# EAGLE board mrShark 08 (EAGLE 6.1)
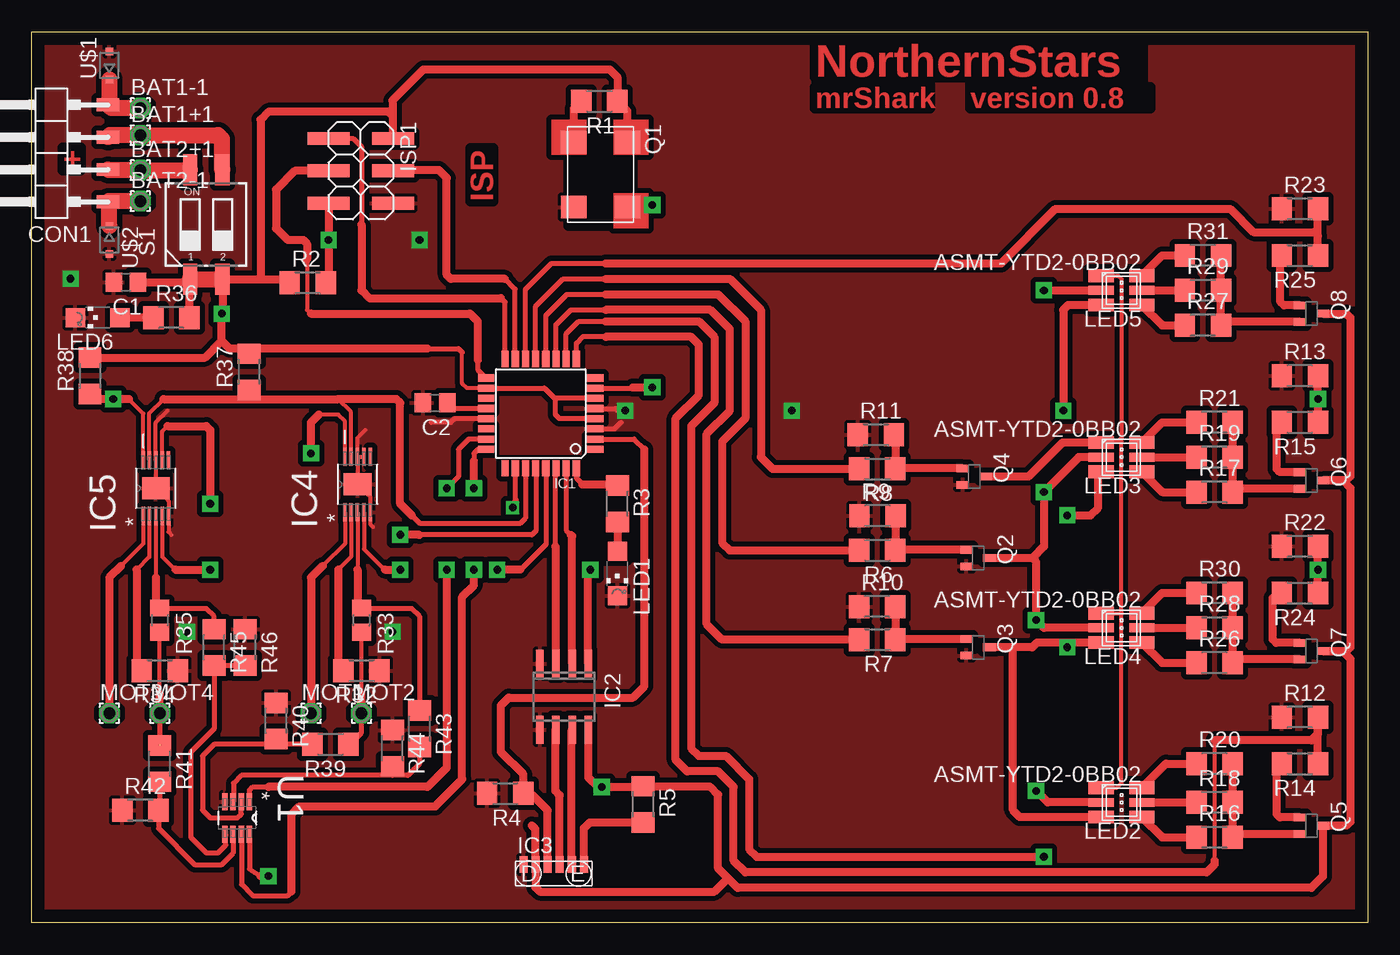
[diagram p0: board, top side]
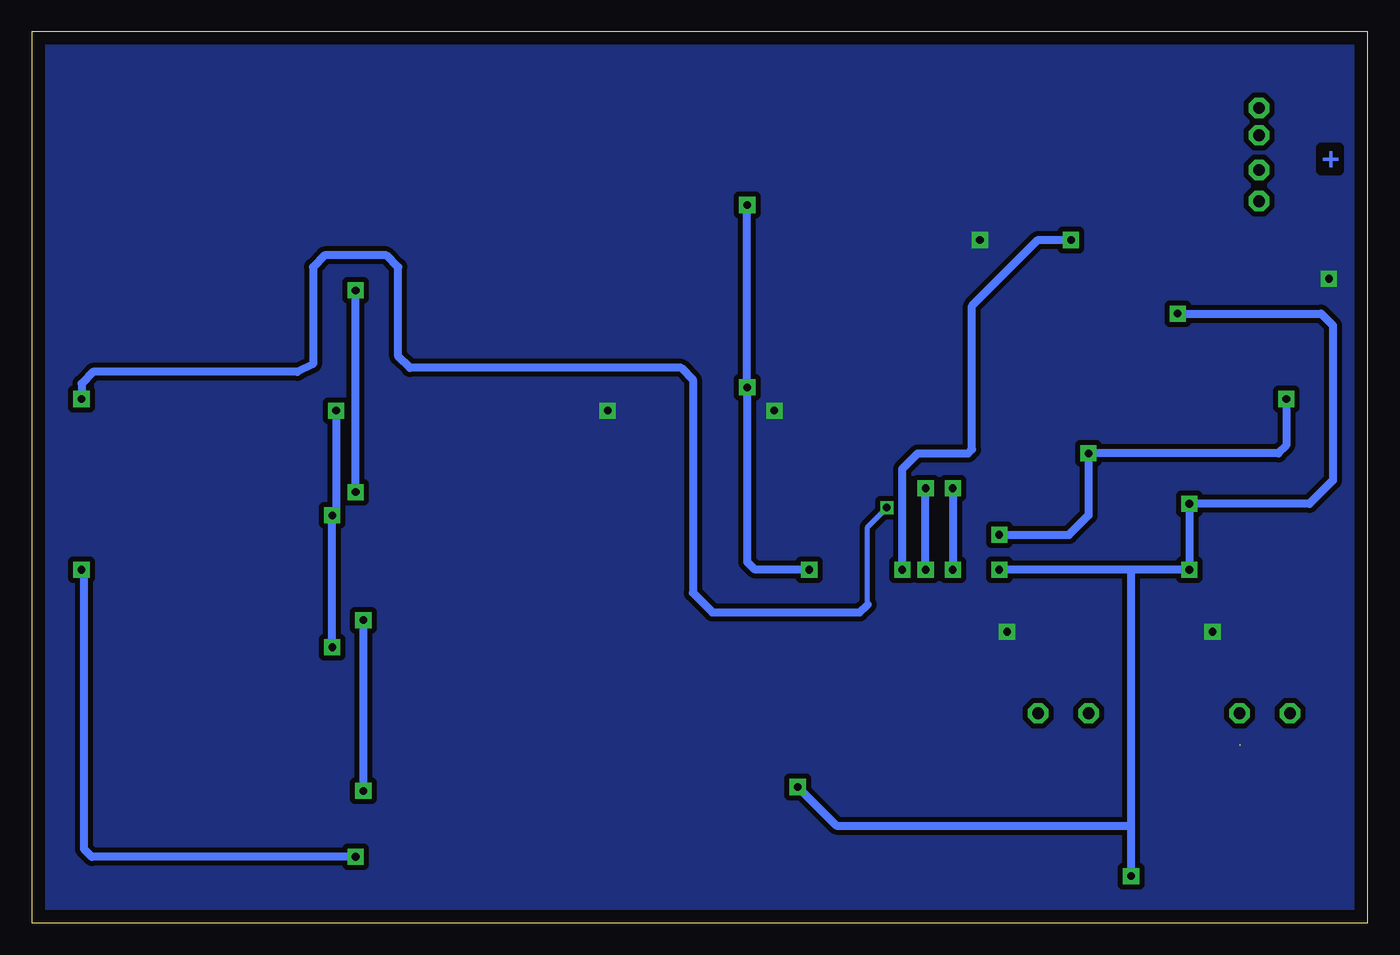
[diagram p1: board, bottom side, seen from below]

Size 105 x 70 mm. Coordinates in mm from the lower left corner, seen from the top.
Outline: 0,0 0,70 105,70 105,0 0,0
Copper layers (1*16): Top 0.035mm / dielectric 1.5mm / Bottom 0.035mm
Design rules: minimum track width 10mil, minimum drill 24mil, track to track 8mil, track to pad 8mil, pad to pad 8mil, via to via 8mil, smd to smd 8mil, copper to edge 40mil, drill to drill 8mil, minimum pad ring 10mil, minimum via ring 8mil, stop-mask expansion 4mil, vias tented up to drill 0mil, thermal gap 10mil

## Footprints (pad centres in the part's own frame; a part is rotated, then mirrored left to right if it is on the bottom)
1,6/0,9 = drill 0.914 pad 1.6 octagon: 1 0,0
C0805 = smd 1.3 x 1.5: 1 -0.95,0; 2 0.95,0
1X04SMD/90 = smd 1.016 x 1.778: 1 -1.27,-5.08; 2 1.27,-5.08; 3 3.81,-5.08; 4 6.35,-5.08
TQFP32-08 = smd 1.27 x 0.559: 1 -4.293,2.8; 2 -4.293,2; 3 -4.293,1.2; 4 -4.293,0.4; 5 -4.293,-0.4; 6 -4.293,-1.2; 7 -4.293,-2; 8 -4.293,-2.8; 17 4.293,-2.8; 18 4.293,-2; 19 4.293,-1.2; 20 4.293,-0.4; 21 4.293,0.4; 22 4.293,1.2; 23 4.293,2; 24 4.293,2.8 | smd 0.559 x 1.27: 9 -2.8,-4.293; 10 -2,-4.293; 11 -1.2,-4.293; 12 -0.4,-4.293; 13 0.4,-4.293; 14 1.2,-4.293; 15 2,-4.293; 16 2.8,-4.293; 25 2.8,4.293; 26 2,4.293; 27 1.2,4.293; 28 0.4,4.293; 29 -0.4,4.293; 30 -1.2,4.293; 31 -2,4.293; 32 -2.8,4.293
SO-08 = smd 0.6 x 2.2: 1 -1.905,-2.6; 2 -0.635,-2.6; 3 0.635,-2.6; 4 1.905,-2.6; 5 1.905,2.6; 6 0.635,2.6; 7 -0.635,2.6; 8 -1.905,2.6
TFBS4711 = smd 0.635 x 1.27: 1 2.37,0.72; 2 1.42,0.72; 3 0.47,0.72; 4 -0.48,0.72; 5 -1.43,0.72; 6 -2.38,0.72
SOP65P640X110-15N = smd 1.422 x 0.279: 1 -2.184,0.991; 2 -2.184,0.508; 3 -2.184,0; 4 -2.184,-0.508; 5 -2.184,-0.991; 6 2.184,-0.991; 7 2.184,-0.508; 8 2.184,0; 9 2.184,0.508; 10 2.184,0.991 | smd 1.727 x 2.184: 11 0,0
2X03SMD = smd 1.016 x 3.302: 1 -1.27,-3.81; 2 -1.27,1.27; 3 1.27,-3.81; 4 1.27,1.27; 5 3.81,-3.81; 6 3.81,1.27
CHIPLED_1206 = smd 1.5 x 1.5: A 0,-1.75; C 0,1.75
PLCC6K = smd 2 x 1: 1 1.6,-1.15; 3 1.6,1.15; 4 -1.6,1.15; 6 -1.6,-1.15 | smd 2 x 0.7: 2 1.6,0; 5 -1.6,0
HC736 = smd 1.8 x 2: 1 -2.54,-2.1; 2 2.54,-2.1; 3 2.54,2.1; 4 -2.54,2.1
SOT323-BEC = smd 0.6 x 1: B -0.65,-0.9; C 0,0.9; E 0.65,-0.9
R1206 = smd 1.6 x 1.803: 1 -1.422,0; 2 1.422,0
R0805 = smd 1.3 x 1.5: 1 -0.95,0; 2 0.95,0
CTS-219-02 = smd 1.13 x 2.44: 1 -1.27,-4.3; 2 1.27,-4.3; 3 1.27,4.3; 4 -1.27,4.3
SOT65P280X145-8N = smd 1.321 x 0.432: 1 -1.27,0.965; 2 -1.27,0.33; 3 -1.27,-0.33; 4 -1.27,-0.965; 5 1.27,-0.965; 6 1.27,-0.33; 7 1.27,0.33; 8 1.27,0.965
SOD323-R = smd 0.6 x 0.6: A 1.1,0; C -1.1,0

## Placement (x,y rotation side)
BAT1+1  [1,6/0,9]  8.53,61.87 0 top
BAT1-1  [1,6/0,9]  8.53,64.01 0 top
BAT2+1  [1,6/0,9]  8.53,59.13 0 top
BAT2-1  [1,6/0,9]  8.53,56.69 0 top
C1  100n  [C0805]  7.39,50.32 180 top
C2  100n  [C0805]  31.7,40.84 180 top
CON1  [1X04SMD/90]  0.91,57.91 90 top
IC1  MEGA48/88/168-AU  [TQFP32-08]  40,40 180 top
IC2  TIR1000PSR  [SO-08]  41.83,17.75 180 top
IC3  TFBS4711TR1  [TFBS4711]  41.02,3.86 0 top
IC4  DRV8830DGQRMSOP  [SOP65P640X110-15N]  25.6,34.44 90 top
IC5  DRV8830DGQRMSOP  [SOP65P640X110-15N]  9.75,34.14 90 top
ISP1  [2X03SMD]  27.13,60.35 270 top
LED1  green  [CHIPLED_1206]  46.02,27.43 180 top
LED2  ASMT-YTD2-0BB02  [PLCC6K]  85.65,9.45 180 top
LED3  ASMT-YTD2-0BB02  [PLCC6K]  85.65,36.58 180 top
LED4  ASMT-YTD2-0BB02  [PLCC6K]  85.65,23.16 180 top
LED5  ASMT-YTD2-0BB02  [PLCC6K]  85.65,49.68 180 top
LED6  red  [CHIPLED_1206]  5.18,47.55 90 top
MOT1  [1,6/0,9]  21.95,16.46 0 top
MOT2  [1,6/0,9]  25.91,16.46 0 top
MOT3  [1,6/0,9]  6.1,16.46 0 top
MOT4  [1,6/0,9]  10.06,16.46 0 top
Q1  ASFLM1-1.8432MHZ-L-C-T  [HC736]  44.7,58.78 270 top
Q2  BC817W  [SOT323-BEC]  74.37,28.65 270 top
Q3  BC817W  [SOT323-BEC]  74.37,21.64 270 top
Q4  BC817W  [SOT323-BEC]  74.07,35.05 270 top
Q5  BC817W  [SOT323-BEC]  100.58,7.62 270 top
Q6  BC817W  [SOT323-BEC]  100.58,34.75 270 top
Q7  BC817W  [SOT323-BEC]  100.58,21.34 270 top
Q8  BC817W  [SOT323-BEC]  100.58,47.85 270 top
R1  100k  [R1206]  44.6,64.54 180 top
R2  100k  [R1206]  21.69,50.27 0 top
R3  130R  [R1206]  46.02,32.92 270 top
R4  100k  [R1206]  37.21,10.16 180 top
R5  27R  [R1206]  48.06,9.3 270 top
R6  2k  [R1206]  66.45,29.26 180 top
R7  1k  [R1206]  66.45,22.25 180 top
R8  2k  [R1206]  66.45,35.66 180 top
R9  100k  [R1206]  66.47,31.98 0 top
R10  100k  [R1206]  66.45,24.84 0 top
R11  100k  [R1206]  66.34,38.33 0 top
R12  100k  [R1206]  99.67,16.15 0 top
R13  100k  [R1206]  99.67,42.98 0 top
R14  560R  [R1206]  99.67,12.5 180 top
R15  560R  [R1206]  99.67,39.32 180 top
R16  75R  [R1206]  92.96,6.71 0 top
R17  75R  [R1206]  92.96,33.83 0 top
R18  130R  [R1206]  92.96,9.45 0 top
R19  130R  [R1206]  92.96,36.58 0 top
R20  130R  [R1206]  92.96,12.5 0 top
R21  130R  [R1206]  92.96,39.32 0 top
R22  100k  [R1206]  99.67,29.57 0 top
R23  100k  [R1206]  99.67,56.08 0 top
R24  560R  [R1206]  99.67,25.91 180 top
R25  560R  [R1206]  99.67,52.43 180 top
R26  75R  [R1206]  92.96,20.42 0 top
R27  75R  [R1206]  92.05,46.94 0 top
R28  130R  [R1206]  92.96,23.16 0 top
R29  130R  [R1206]  92.05,49.68 0 top
R30  130R  [R1206]  92.96,25.91 0 top
R31  130R  [R1206]  92.05,52.43 0 top
R32  0.95R  [R1206]  25.91,19.81 180 top
R33  0R2  [R0805]  25.91,23.77 270 top
R34  0.95R  [R1206]  10.06,19.81 180 top
R35  0R2  [R0805]  10.06,23.77 270 top
R36  130R  [R1206]  10.97,47.55 0 top
R37  1k8  [R1206]  17.07,43.28 90 top
R38  1k8  [R1206]  4.57,42.98 90 top
R39  1k5  [R1206]  23.47,14.02 180 top
R40  75k  [R1206]  19.2,15.85 270 top
R41  1k5  [R1206]  10.06,12.5 270 top
R42  75k  [R1206]  8.53,8.84 0 top
R43  1k5  [R1206]  30.48,15.24 270 top
R44  75k  [R1206]  28.35,13.72 270 top
R45  1k5  [R1206]  14.33,21.64 270 top
R46  75k  [R1206]  16.76,21.64 270 top
S1  MCEMR-02-T  [CTS-219-02]  13.72,54.86 0 top
U1  OPA2348AIDCNTG4  [SOT65P280X145-8N]  16.15,8.23 270 top
U$1  PMEG2010EAR  [SOD323-R]  6.1,67.36 90 top
U$2  PMEG2010EAR  [SOD323-R]  6.1,53.64 270 top

## Library data of the parts
BAT1+1 BAT1-1 BAT2+1 BAT2-1 MOT1-MOT4 = wirepad
C1 C2 R1-R46 = rcl
CON1 ISP1 = pinhead-2
IC1 = avr-6
IC2 = texas
IC3 = vishay
IC4 IC5 = texas; MPN: DRV8830DGQR; OC_FARNELL: 1863106; OC_NEWARK: 58T1482; PACKAGE: MSOP-10; SUPPLIER: TEXAS INSTRUMENTS
LED1-LED6 = led
Q1 = crystal
Q2-Q8 = transistor-npn
S1 = switch-dil
U1 = texas; MPN: OPA2348AIDCNTG4; OC_FARNELL: 1207098; OC_NEWARK: 97K6805; PACKAGE: SOT23-8; SUPPLIER: Texas Instruments
U$1 U$2 = diode

## Nets
BAT1+: BAT1+1.1 CON1.3 S1.3
BAT1-: BAT1-1.1 CON1.4 U$1.C
BAT2+: BAT2+1.1 CON1.2 S1.4
BAT2-: BAT2-1.1 CON1.1 U$2.C
CLK: IC1.7 IC2.1 Q1.3
COLOR_B: LED2.1 LED3.1 LED4.1 LED5.1 Q4.C
COLOR_G: LED2.2 LED3.2 LED4.2 LED5.2 Q2.C
COLOR_R: LED2.3 LED3.3 LED4.3 LED5.3 Q3.C
GND: C1.2 C2.2 IC1.3 IC1.5 IC1.21 IC2.4 IC2.5 IC3.6 IC4.5 IC4.7 IC4.8 IC4.11 IC5.5 IC5.8 IC5.11 ISP1.6 LED1.C LED6.C Q1.2 Q2.E Q3.E Q4.E R4.2 R9.1 R10.1 R11.1 R12.1 R13.1 R22.1 R23.1 R32.1 R34.1 R40.1 R42.1 R44.1 R46.1 U1.4 U$1.A U$2.A
INT1: IC1.1
IR_SD: IC1.2 IC3.4 R4.1
IRDA: IC3.1 R5.2
ISENS_MOTL: IC1.23 U1.1
ISENS_MOTR: IC1.24 U1.7
LED1: IC1.9 R12.2 R14.1
LED2: IC1.10 R22.2 R24.1
LED3: IC1.26 R13.2 R15.1
LED4: IC1.14 R23.2 R25.1
LED_B: IC1.13 R8.2
LED_G: IC1.12 R6.2
LED_R: IC1.11 R7.2
MISO: IC1.16 ISP1.1
MOSI: IC1.15 ISP1.4
N$1: IC4.1 MOT1.1
N$2: IC4.2 R32.2
N$3: R39.2 R40.2 U1.2
N$4: Q1.1 R1.2
N$5: LED2.4 R16.1
N$6: IC5.1 MOT3.1
N$7: IC5.2 R34.2
N$8: LED2.5 R18.1
N$9: Q5.E R16.2 R18.2 R20.2
N$10: LED4.4 R26.1
N$11: LED4.5 R28.1
N$12: LED4.6 R30.1
N$13: Q7.E R26.2 R28.2 R30.2
N$14: Q6.E R17.2 R19.2 R21.2
N$15: LED3.4 R17.1
N$16: LED3.5 R19.1
N$17: LED3.6 R21.1
N$18: Q8.E R27.2 R29.2 R31.2
N$19: Q6.B R15.2
N$20: LED5.4 R27.1
N$21: LED5.5 R29.1
N$22: LED5.6 R31.1
N$23: Q8.B R25.2
N$24: Q7.B R24.2
N$25: Q5.B R14.2
N$26: C2.1 IC1.20
N$27: LED2.6 R20.1
N$28: LED6.A R36.1
N$29: IC1.32 R3.1
N$30: LED1.A R3.2
N$31: R41.2 R42.2 U1.6
N$32: R43.2 R44.2 U1.3
N$33: R45.2 R46.2 U1.5
RESET: IC1.29 ISP1.5 R2.2
RXD: IC1.30 IC2.3
RXIR: IC2.6 IC3.3
SCK: IC1.17 ISP1.3
SCL: IC1.28 IC4.10 IC5.10 R38.1
SDA: IC1.27 IC4.9 IC5.9 R37.1
SENS_MOTL1: IC4.3 R33.1 R43.1
SENS_MOTL2: MOT2.1 R33.2 R39.1
SENS_MOTR1: IC5.3 R35.1 R45.1
SENS_MOTR2: MOT4.1 R35.2 R41.1
TXD: IC1.31 IC2.2
TXIR: IC2.7 IC3.2
VCC: C1.1 IC1.4 IC1.6 IC1.18 IC2.8 IC3.5 IC4.4 IC5.4 IC5.7 ISP1.2 Q1.4 Q5.C Q6.C Q7.C Q8.C R1.1 R2.1 R5.1 R36.2 R37.2 R38.2 S1.1 S1.2 U1.8
X1: Q4.B R8.1 R11.2
X2: Q3.B R7.1 R10.2
X3: Q2.B R6.1 R9.2

## Tracks (layer width: path | path; a pad name or v marks a point on that pad's centre or on a via)
BAT1+
  Top 1.27: CON1.3 6.15,61.87 BAT1+1.1 14.63,61.87 14.94,61.57 14.94,59.22 S1.3
BAT1-
  Top 1.27: BAT1-1.1 6.25,64.01 CON1.4 6.1,64.36 U$1.C
BAT2+
  Top 1.27: CON1.2 6.04,59.13 BAT2+1.1 12.41,59.13 S1.4
BAT2-
  Top 1.27: BAT2-1.1 6.04,56.69 CON1.1 6.1,56.54 U$2.C
CLK  (via drill 0.6 pad 1.27)
  Top 0.406: IC1.7 47.18,42 47.24,42.06
  Top 0.61: IC2.1 43.74,27.28 v43.89,27.74 | 47.24,42.06 v48.77,42.06 | v48.77,56.39 46.96,56.39 Q1.3
  Bottom 0.61: v43.89,27.74 48.16,27.74 48.77,28.35 v48.77,42.06 v48.77,56.39
COLOR_B
  Top 0.305: LED5.1 85.41,50.83 85.65,50.6 85.65,38.1 85.5,37.95 | 85.5,37.95 85.34,37.8 84.12,37.8 LED3.1 | LED4.1 85.58,24.32 85.65,24.38 | 85.65,24.38 85.65,37.8 85.5,37.95 | LED2.1 85.28,10.6 85.65,10.97 85.65,24.38
  Top 0.61: LED3.1 81.01,37.73 78.33,35.05 Q4.C
COLOR_G  (via drill 0.6 pad 1.27)
  Top 0.61: LED3.2 82.3,36.58 v79.55,33.83 79.55,29.57 78.64,28.65 | 78.64,28.65 Q2.C | v79.55,49.68 LED5.2 | LED4.2 79.55,23.16 v78.94,23.77 78.94,28.35 78.64,28.65 | LED2.2 79.86,9.45 v78.94,10.36
  Bottom 0.61: v79.55,33.83 v79.55,49.68 | v78.94,23.77 v78.94,10.36
COLOR_R  (via drill 0.6 pad 1.27)
  Top 0.61: 77.11,21.64 78.64,21.64 79.01,22.02 LED4.3 81.76,22.02 v81.38,21.64 | 77.11,21.64 Q3.C | LED5.3 81.45,48.53 81.08,48.16 v81.08,40.23 | v81.38,32 83.21,32 83.82,32.61 83.82,35.2 LED3.3 | LED2.3 77.66,8.3 77.11,8.84 77.11,21.64
  Bottom 0.61: v81.08,40.23 81.08,32.61 v81.38,32 v81.38,21.64
GND  (via drill 0.6 pad 1.27)
  Top 0.305: IC4.8 IC4.7 | IC4.8 IC4.11 26.59,33.45 IC4.5 26.59,31.32 26.82,31.09 | 10.67,40.23 9.75,39.32 IC5.8 IC5.11 10.74,33.15 IC5.5 10.74,30.71 10.97,30.48 | IC4.8 25.6,38.1 26.21,38.71
  Top 0.406: IC1.21 33.2,39.6 32.92,39.32 31.39,39.32 | IC1.5 45.86,40.4 46.02,40.23 | IC1.3 45.81,38.8 46.33,39.32
  other vias: 12.19,22.86 3.05,50.6 30.48,53.64 46.63,40.23 28.35,22.86 59.74,40.23
  pour Bottom (isolate 0.406): 0,0 0,70.1 105.16,70.1 105.16,0
  pour Top (isolate 0.406): 0,0 0,70.1 105.16,70.1 105.16,0
IR_SD
  Top 0.406: IC1.2 47.34,38 48.16,37.19
  Top 0.61: IC3.4 40.54,8.84 39.32,10.06 38.73,10.06 R4.1 38.63,11.66 36.88,13.41 36.88,17.07 37.49,17.68 47.24,17.68 48.16,18.59 48.16,37.19
IRDA
  Top 0.61: R5.2 43.84,7.87 43.39,7.42 IC3.1
ISENS_MOTL  (via drill 0.6 pad 1.27)
  Top 0.406: U1.1 17.12,10.41 17.37,10.67 18.59,10.67 | IC1.23 34.34,38 33.53,37.19 33.53,35.05 v32.61,34.14
  Top 0.61: v32.61,27.74 32.61,12.19 31.09,10.67 18.59,10.67
  Bottom 0.61: v32.61,34.14 v32.61,27.74
ISENS_MOTR  (via drill 0.6 pad 1.27)
  Top 0.406: U1.7 16.48,3.02 17.37,2.13 20.12,2.13 20.42,2.44 | IC1.24 35.07,37.2 34.75,36.88 34.75,36.27
  Top 0.61: 20.42,2.44 20.42,8.53 21.03,9.14 31.7,9.14 33.83,11.28 33.83,25.6 34.75,26.52 v34.75,27.74 | v34.75,34.14 34.75,36.27
  Bottom 0.61: v34.75,27.74 v34.75,34.14
LED1
  Top 0.305: 92.96,14.33 92.96,4.88
  Top 0.406: 45.11,46.02 43.28,46.02 42.8,45.54 IC1.9
  Top 0.61: R14.1 R12.2 101.09,14.83 100.58,14.33 92.96,14.33 | 92.96,4.88 92.96,4.57 92.35,3.96 56.08,3.96 55.17,4.88 55.17,10.67 53.95,11.89 51.51,11.89 50.6,12.8 50.6,39.62 52.43,41.45 52.43,45.41 51.82,46.02 45.11,46.02
LED2  (via drill 0.6 pad 1.27)
  Top 0.406: IC1.10 42,46.27 42.98,47.24 45.11,47.24
  Top 0.61: R24.1 v101.09,27.74 R22.2 | 45.11,47.24 52.43,47.24 53.65,46.02 53.65,40.84 51.82,39.01 51.82,13.72 52.43,13.11 54.56,13.11 56.39,11.28 56.39,5.79 57,5.18 v79.55,5.18
  Bottom 0.61: v79.55,5.18 100.28,5.18 100.89,5.79 100.89,27.53 v101.09,27.74
LED3  (via drill 0.6, 0.6 pad 1.27)
  Top 0.406: v37.8,32.61 37.8,32.92 38.1,33.22 38,33.32 IC1.26
  Top 0.61: R13.2 v101.09,41.15 R15.1
  Bottom 0.406: 39.32,24.99 39.32,31.09 v37.8,32.61
  Bottom 0.61: v101.09,41.15 101.09,42.37 100.18,43.28 84.12,43.28 82.91,43.89 82.91,51.51 81.99,52.43 77.11,52.43 76.2,51.51 76.2,44.5 75.29,43.59 53.95,43.59 53.03,42.67 53.03,25.91 51.51,24.38 39.93,24.38 39.32,24.99
LED4
  Top 0.406: IC1.14 38.8,49.77 40.84,51.82 45.11,51.82
  Top 0.61: R25.1 101.09,53.95 | 101.09,53.95 R23.2 | 45.11,51.82 76.2,51.82 80.47,56.08 94.18,56.08 96.01,54.25 100.79,54.25 101.09,53.95
LED_B
  Top 0.406: IC1.13 39.6,48.44 41.76,50.6 45.11,50.6
  Top 0.61: 45.11,50.6 54.86,50.6 57.3,48.16 57.3,36.58 58.22,35.66 R8.2
LED_G
  Top 0.406: IC1.12 40.4,47.72 42.06,49.38 45.11,49.38
  Top 0.61: 45.11,49.38 53.95,49.38 56.08,47.24 56.08,39.62 54.25,37.8 54.25,29.87 54.86,29.26 R6.2
LED_R
  Top 0.406: IC1.11 41.2,46.99 42.37,48.16 45.11,48.16
  Top 0.61: R7.2 54.25,22.25 53.03,23.47 53.03,38.41 54.86,40.23 54.86,46.63 53.34,48.16 45.11,48.16
MISO
  Top 0.406: ISP1.1 25.25,61.62 25.91,60.96 25.91,54.86 | IC1.16 37.2,48.75 36.88,49.07
  Top 0.61: 25.91,54.86 25.91,49.68 26.52,49.07 36.88,49.07
MOSI
  Top 0.406: IC1.15 38,49.78 37.19,50.6
  Top 0.61: 37.19,50.6 32.92,50.6 32.61,50.9 32.61,58.52 32,59.13 28.45,59.13 ISP1.4
N$1
  Top 0.305: IC4.1 24.61,29.79 22.86,28.04
  Top 0.61: 22.86,28.04 21.95,27.13 MOT1.1
N$2
  Top 0.305: IC4.2 25.09,28.75 24.08,27.74
  Top 0.61: 24.08,27.74 24.08,19.91 R32.2
N$3
  Top 0.406: R39.2 19.2,14.02 | 19.2,14.02 14.33,14.02 13.41,13.11 13.41,8.84 14.02,8.23 16.15,8.23 16.46,8.53 16.46,9.47 U1.2 | R40.2 19.2,14.02
N$4
  Top 0.61: Q1.1 42.6,63.97 R1.2
N$5
  Top 0.61: LED2.4 88.84,6.71 R16.1
N$6
  Top 0.305: IC5.1 8.76,29.79 7.01,28.04
  Top 0.61: 7.01,28.04 6.1,27.13 MOT3.1
N$7
  Top 0.305: IC5.2 9.25,28.75 8.23,27.74
  Top 0.61: 8.23,27.74 8.23,20.22 R34.2
N$8
  Top 0.61: LED2.5 R18.1
N$9
  Top 0.61: R20.2 R18.2 R16.2 94.04,6.97 Q5.E
N$10
  Top 0.61: LED4.4 88.84,20.42 R26.1
N$11
  Top 0.61: LED4.5 R28.1
N$12
  Top 0.61: LED4.6 88.84,25.91 R30.1
N$13
  Top 0.61: Q7.E 94.35,20.69 R26.2 R28.2 R30.2
N$14
  Top 0.61: R21.2 R19.2 R17.2 94.65,34.1 Q6.E
N$15
  Top 0.61: LED3.4 88.84,33.83 R17.1
N$16
  Top 0.61: LED3.5 R19.1
N$17
  Top 0.61: LED3.6 88.84,39.32 R21.1
N$18
  Top 0.61: R31.2 R29.2 R27.2 93.74,47.2 Q8.E
N$19
  Top 0.61: Q6.B 98.11,35.4 97.84,35.66 97.84,38.91 R15.2
N$20
  Top 0.61: LED5.4 88.84,46.94 R27.1
N$21
  Top 0.61: LED5.5 R29.1
N$22
  Top 0.61: LED5.6 88.84,52.43 R31.1
N$23
  Top 0.61: Q8.B 98.41,48.5 98.15,48.77 98.15,52.32 R25.2
N$24
  Top 0.61: Q7.B 97.8,21.99 97.54,22.25 97.54,25.5 R24.2
N$25
  Top 0.61: Q5.B 98.11,8.27 97.84,8.53 97.84,12.09 R14.2
N$26
  Top 0.406: IC1.20 32.79,40.4 C2.1
N$27
  Top 0.61: LED2.6 89.15,12.5 R20.1
N$28
  Top 0.61: R36.1 LED6.A
N$29
  Top 0.406: IC1.32 42.8,34.92 43.28,34.44
  Top 0.61: 43.28,34.44 45.92,34.44 R3.1
N$30
  Top 0.61: R3.2 LED1.A
N$31
  Top 0.406: R41.2 10.06,8.94 R42.2 9.96,7.42 12.8,4.57 14.94,4.57 15.82,5.46 U1.6
N$32
  Top 0.406: R43.2 30.48,12.5 29.57,11.58 28.35,11.58 | 28.35,11.58 16.46,11.58 15.85,10.97 15.85,9.53 U1.3 | R44.2 28.35,11.58
N$33
  Top 0.406: R46.2 R45.2 14.33,15.24 12.5,13.41 12.5,6.71 13.72,5.49 14.63,5.49 15.24,6.1 15.24,6.91 U1.5
RESET  (via drill 0.6 pad 1.27)
  Top 0.406: IC1.29 40.4,29.73 38.41,27.74
  Top 0.61: ISP1.5 v23.32,53.65 23.32,50.47 R2.2 | 38.41,27.74 v36.58,27.74
  Bottom 0.61: v36.58,27.74 36.58,35.66 35.36,36.88 31.39,36.88 31.09,37.19 31.09,48.46 25.91,53.65 v23.32,53.65
RXD
  Top 0.406: IC2.3 | 41.15,29.57 41.15,35.66 IC1.30
  Top 0.61: IC2.3 41.2,29.52 41.15,29.57
RXIR
  Top 0.61: IC3.3 41.49,10.02 41.15,10.36 41.15,15.1 IC2.6
SCK
  Top 0.305: 21.64,52.12 21.64,48.16 21.95,47.85
  Top 0.406: 35.05,44.2 35.05,43.45 IC1.17
  Top 0.61: ISP1.3 20.68,59.08 19.2,57.61 19.2,54.56 20.12,53.65 21.34,53.65 21.64,53.34 21.64,52.12 | 21.95,47.85 34.44,47.85 35.05,47.24 35.05,44.2
SCL  (via drill 0.6 pad 1.27)
  Top 0.305: IC5.10 8.76,40.01 7.62,41.15 | IC4.10 24.61,39.4 24.08,39.93 22.55,39.93
  Top 0.406: IC1.28 39.62,35.68 39.62,30.79 39.32,30.48 30.48,30.48
  Top 0.61: 7.62,41.15 v6.4,41.15 4.98,41.15 R38.1 | v21.95,36.88 21.95,39.32 22.55,39.93 | 30.48,30.48 v28.96,30.48
  Bottom 0.61: v6.4,41.15 6.4,37.49 7.01,36.88 v21.95,36.88 21.95,32 23.47,30.48 v28.96,30.48
SDA
  Top 0.305: IC5.9 9.25,40.03 10.36,41.15 | IC4.9 25.09,40.13 24.08,41.15
  Top 0.406: 29.87,32 30.48,31.39 38.41,31.39 38.8,31.79 IC1.27
  Top 0.61: 10.36,41.15 17.07,41.15 | 17.07,41.15 24.08,41.15 28.65,41.15 28.96,40.84 28.96,32.92 29.87,32 | R37.1 17.07,41.15
SENS_MOTL1
  Top 0.305: IC4.3 25.6,27.74
  Top 0.406: R33.1 25.94,24.69 29.87,24.69 30.48,24.08 R43.1
  Top 0.61: 25.6,27.74 25.6,25.03 R33.1
SENS_MOTL2
  Top 0.305: 25.91,17.98 R33.2
  Top 0.406: MOT2.1 25.91,14.94 25.6,14.63 25.3,14.33 24.99,14.02 R39.1
  Top 0.61: MOT2.1 25.91,17.98
SENS_MOTR1
  Top 0.305: IC5.3 9.75,27.13
  Top 0.406: R35.1 10.09,24.69 13.72,24.69 14.33,24.08 R45.1
  Top 0.61: 9.75,27.13 9.75,25.03 R35.1
SENS_MOTR2  (1 unrouted)
  Top 0.305: 10.06,17.98 R35.2
  Top 0.406: MOT4.1 10.06,14.02 10.06,13.72
  Top 0.61: MOT4.1 10.06,17.98
TXD
  Top 0.406: IC1.31 42,30.85 42.37,30.48
  Top 0.61: IC2.2 42.47,30.38 42.37,30.48
TXIR
  Top 0.61: IC3.2 42.44,15.13 IC2.7
VCC  (via drill 0.6 pad 1.27)
  Top 0.305: IC5.4 10.26,28.75 11.28,27.74 | IC4.4 26.11,29.36 27.74,27.74 | IC5.7 10.26,38.61 10.67,39.01 | IC1.18 34.2,42 33.83,42.37 33.83,44.81
  Top 0.406: U1.8 17.12,4.22 17.98,3.66 | IC1.18 40.3,42 41.15,41.15 | 41.15,41.15 41.2,41.2 IC1.6 | IC1.4 41.48,39.6 41.15,39.93 41.15,41.15 | 31.09,45.11 33.53,45.11 33.83,44.81
  Top 0.61: Q8.C 103.33,47.85 103.63,47.55 103.63,35.05 103.33,34.75 Q6.C 103.02,34.75 103.63,34.14 103.63,21.64 103.33,21.34 Q7.C 103.02,21.34 103.63,20.73 103.63,7.92 103.33,7.62 Q5.C 101.48,3.64 100.58,2.74 55.47,2.74 54.71,3.5 | IC2.8 43.74,11.43 44.5,10.67 v44.81,10.67 48.01,10.67 R5.1 48.11,10.67 53.34,10.67 53.95,10.06 53.95,4.27 54.71,3.5 | 17.98,50.56 S1.2 14.99,47.9 v14.94,47.85 14.94,45.72 | 17.98,50.56 19.97,50.56 R2.1 | 11.28,27.74 v14.02,27.74 | 27.74,27.74 v28.96,27.74 | 17.98,3.66 v18.59,3.66 | 10.67,39.01 13.72,39.01 14.02,38.71 v14.02,32.92 | 31.09,45.11 17.07,45.11 | 17.07,45.11 15.54,45.11 14.94,45.72 | 39.32,7.62 39.59,7.35 IC3.5 39.59,2.78 39.93,2.44 53.65,2.44 54.71,3.5 | C1.1 12.2,50.32 S1.1 12.39,50.51 R36.2 | ISP1.2 28.4,63.35 28.35,63.4 | 28.35,63.4 28.04,63.7 18.59,63.7 17.98,63.09 17.98,50.56 | 28.35,63.4 28.35,64.62 30.79,67.06 45.41,67.06 46.02,66.45 R1.1 46.8,63.76 Q1.4 | R38.2 13.61,44.4 14.94,45.72 | R37.2 17.07,45.11
  Top 1.27: S1.1 S1.2
  Bottom 0.61: 18.59,27.74 v14.02,27.74 v14.02,32.92 4.57,32.92 2.74,34.75 2.74,46.94 3.66,47.85 v14.94,47.85 | 18.59,27.74 v28.96,27.74 | v18.59,3.66 18.59,7.62 | 18.59,7.62 18.59,27.74 | 18.59,7.62 41.76,7.62 v44.81,10.67
X1
  Top 0.61: Q4.B 67.91,35.7 | 67.91,35.7 R8.1 | 67.91,35.7 67.91,38.19 R11.2
X2
  Top 0.61: Q3.B 67.91,22.29 | 67.91,22.29 R7.1 | 67.91,22.29 67.91,24.8 R10.2
X3
  Top 0.61: Q2.B 67.91,29.3 | 67.91,29.3 R6.1 | 67.91,29.3 67.91,31.96 R9.2
(copper drawn outside any net)
  shapes: Top area x3

## Text on the board
Top: NorthernStars | mrShark | version 0.8 | + | ISP
Bottom: +